# Altium PCB simplefocmini_2022-04-20.pcbdoc
Units mil, origin at the board's own origin, x right, y up, seen from the top; angles counter-clockwise.
Board outline 2697.58 x 2482.54 mil, 2 copper layers (Top Layer, Bottom Layer); 16 components, 31 nets, 68 pads, 40 vias.
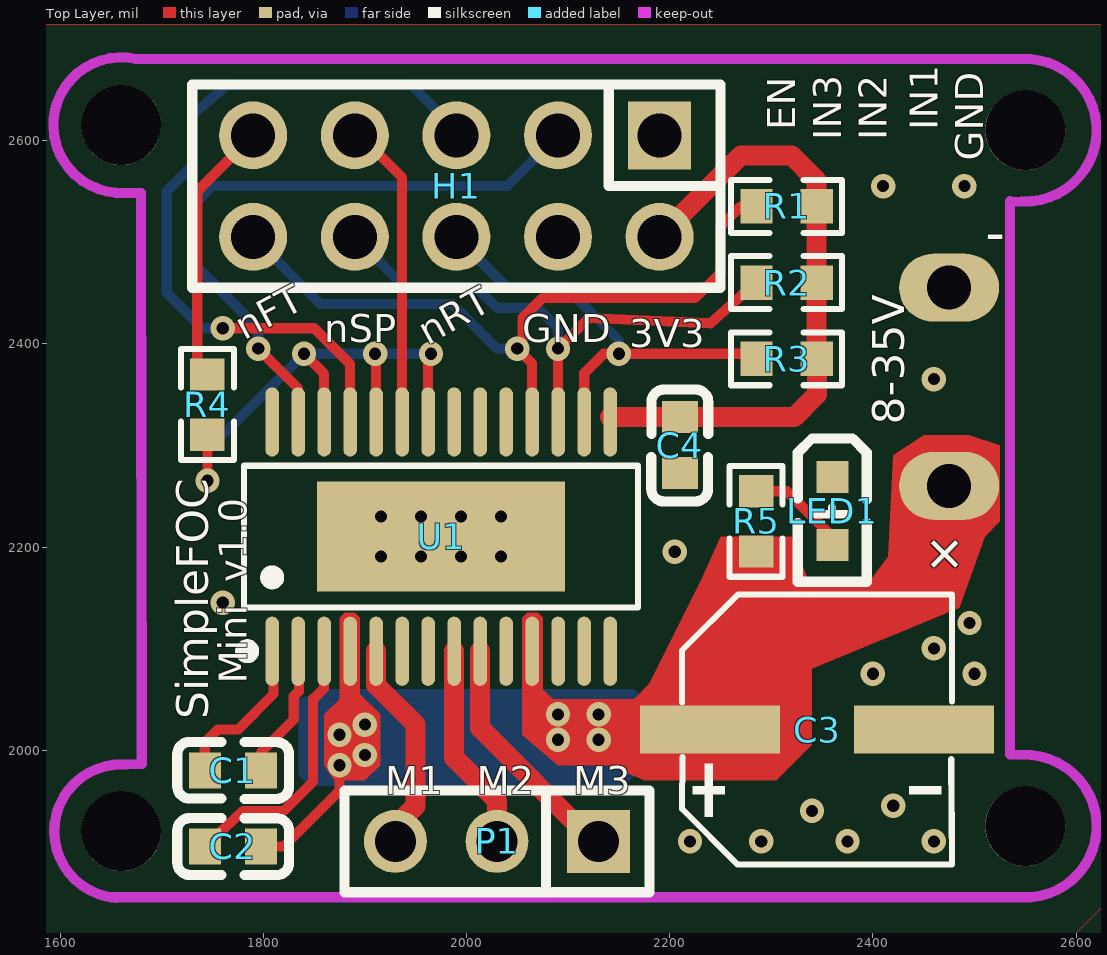
[diagram p0: Top Layer view]
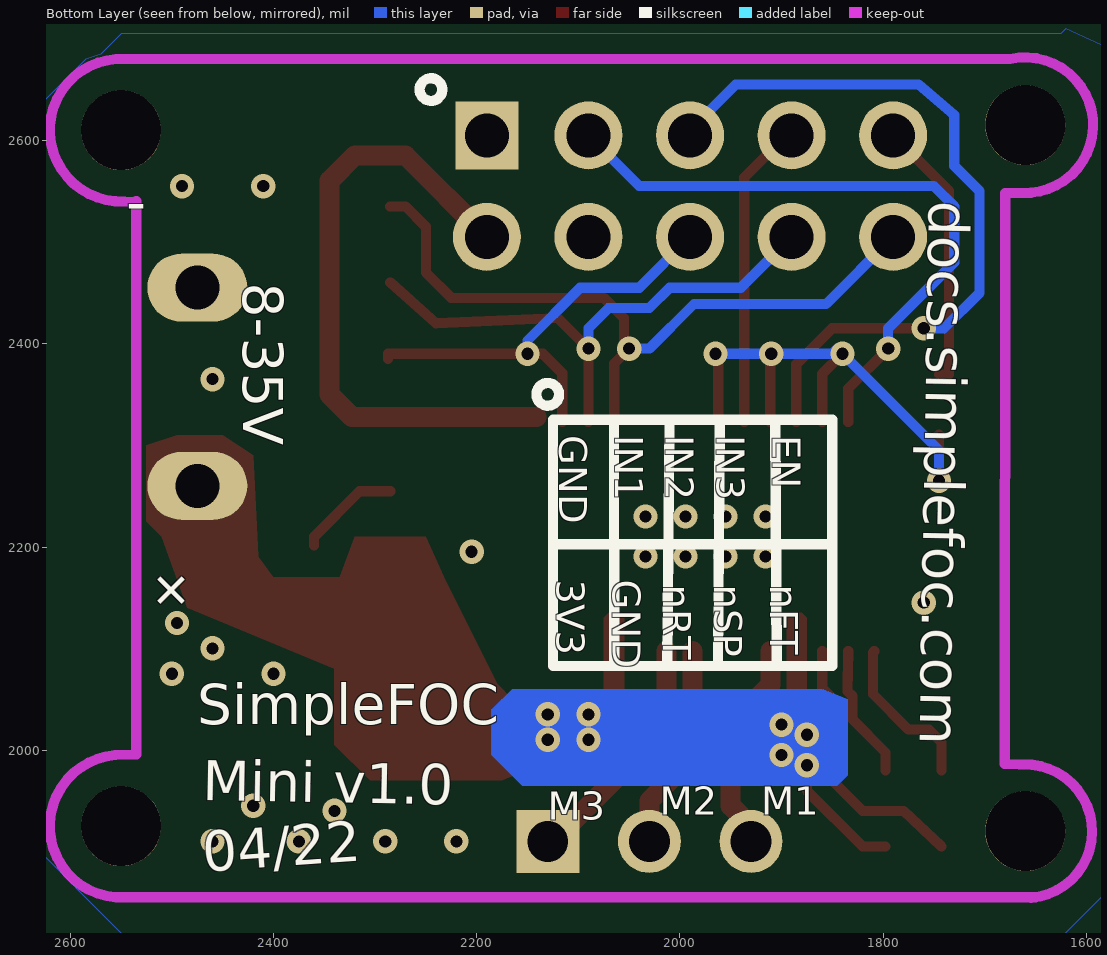
[diagram p1: Bottom Layer view, seen from below]

## Layer stack, top to bottom
Top Layer: signal copper (thickness not stored)
Dielectric: dielectric 12.6, FR-4, Dk 4.8
Bottom Layer: signal copper (thickness not stored)

## Board outline
3697.58,1000 1000,1000 1000,3482.54 3697.58,3482.54

## Components (designator, comment, footprint, x,y, rotation, side; value= is the part's Value field where it differs from the comment)
C1 "100nF" C0603 1770,1980.24 r180 top
C2 "100nF" C0603 1770,1905.24 r180 top
C3 "100uF" CAP-SMD_BD6.3-L6.6-W6.6-FD 2345,2020.24 r0 top
C4 "470nF" C0603 2210,2300.24 r90 top
H1 "Female header2.54mm2*5p Straight" HDR-TH_10P-P2.54-V-F-R2-C5-S2.54 1990,2555.24 r180 top
LED1 "19-213/Y2C-CQ2R2L/3T(CY)" LED0603-R-RD 2360,2235.24 r270 top
P1 "Header-Female-2.54_1x3" HDR-TH_3P-P2.54-V-F 2030,1910.24 r180 top
R1 "10kΩ" R0603 2315,2535.24 r180 top
R2 "10kΩ" R0603 2315,2460.24 r180 top
R3 "10kΩ" R0603 2315,2385.24 r180 top
R4 "10kΩ" R0603 1745,2340.24 r90 top
R5 "1kΩ" R0603 2285,2225.24 r90 top
U1 "DRV8313PWPR" HTSSOP-28_L9.8-W4.5-P0.65-LS6.6-BL-EP 1975,2210.24 r0 top
? "" ? 2795.29,2267.74 r0 top
? "" ? 2107.5,2800.39 r0 top
? "" ? 2107.56,1832.27 r0 top

## Footprints (in the part's own frame and the unit in brackets; to place one, negate y for a bottom-side part, rotate by r counter-clockwise, add the part's x,y. Pads: shape width x height; smd on the part's side, far side on the other; paste and mask are expansions set on the pad)
C0603 [mm]
  rect 0.8x0.9 smd: 1(-0.7,0) 2(0.7,0)
  silkscreen extent -1.41,-0.71 1.39,0.72
CAP-SMD_BD6.3-L6.6-W6.6-FD [mm]
  rect 3.5x1.2 smd: 1(-2.67,0) 2(2.67,0)
  silkscreen extent -3.38,-3.38 3.38,3.38
HDR-TH_3P-P2.54-V-F [mil]
  rect 62x62 hole 40.16: 1(-100,0)
  round 62 hole 40.16: 2(0,0) 3(100,0)
  silkscreen extent -150,-50 150,50
HDR-TH_10P-P2.54-V-F-R2-C5-S2.54 [mm]
  rect 1.575x1.7 hole 1.1: 1(-5.08,-1.27)
  round 1.7 hole 1.1: 2(-5.08,1.27) 3(-2.54,-1.27) 4(-2.54,1.27) 5(0,-1.27) 6(0,1.27) 7(2.54,-1.27) 8(2.54,1.27) 9(5.08,-1.27) 10(5.08,1.27)
  silkscreen extent -6.6,-2.54 6.6,2.54
HTSSOP-28_L9.8-W4.5-P0.65-LS6.6-BL-EP [mm]
  oval 0.343x1.731 smd: 1(-4.225,-2.866) 2(-3.575,-2.866) 3(-2.925,-2.866) 4(-2.275,-2.866) 5(-1.625,-2.866) 6(-0.975,-2.866) 7(-0.325,-2.866) 8(0.325,-2.866) 9(0.975,-2.866) 10(1.625,-2.866) 11(2.275,-2.866) 12(2.925,-2.866) 13(3.575,-2.866) 14(4.225,-2.866) 15(4.225,2.866) 16(3.575,2.866) 17(2.925,2.866) 18(2.275,2.866) 19(1.625,2.866) 20(0.975,2.866) 21(0.325,2.866) 22(-0.325,2.866) 23(-0.975,2.866) 24(-1.625,2.866) 25(-2.275,2.866) 26(-2.925,2.866) 27(-3.575,2.866) 28(-4.225,2.866)
  rect 6.2x2.75 smd: 29(0,0)
  silkscreen extent -5,-3.02 4.93,1.77
LED0603-R-RD [mm]
  rect 0.8x0.8 smd: 1(0.851,0) 2(-0.851,0)
  silkscreen extent -1.82,-0.86 1.77,0.86
R0603 [mil]
  rect 31.75x34.02 smd: 1(-29.66,0) 2(29.66,0)
  silkscreen extent -55,-26 55,26
? [mil]

## Free pads (board coordinates)
  oval 98.42x66.93 hole 43.31: 2(2475,2455.24) 3(2475,2260.24)
  round 78.74 hole 78.74: 5(1660,1920.24) 5(1660,2615.24) 5(2550,1925.24) 5(2550,2610.24)

## Via types
v1: diameter 24, hole 12, Top Layer to Bottom Layer, tented both sides, 32 vias
v2: diameter 23.62, hole 11.81, Top Layer to Bottom Layer, tented both sides, 8 vias

## Nets (pads, with @x,y where several pads share a name; then routed paths per layer and width w, separated by ;. In a path a pad name is that pad's centre, name@x,y a point inside that pad or via, vN(x,y) a via of type N, cw(c..) or ccw(c..) an arc to the next point about the centre after c; other vN are vias at no path point)
3.3V: C4.2 H1.2 R1.1 R2.1 R3.1 U1.15 | length 621.4
  Top Layer w19.68: U1.15@2141.3,2327.84 2141.34,2327.8 C4.2 2322.56,2327.8 2345,2350.24 R3.1@2345,2385.24 ; H1.2 2270,2585.24 2320,2585.24 2344.66,2560.58 R1.1 R2.1 R3.1
EN: R4.1 U1.22 U1.24 U1.26 | length 543.1
  Top Layer w10: v1(1745,2265.24) R4.1 ; v1(1840,2390.24) 1859.84,2370.4 U1.26 ; v1(1910,2390.24) 1911.02,2389.22 U1.24 ; U1.22 1962.21,2387.45 v1(1965,2390.24)
  Bottom Layer w10: v1(1745,2265.24) 1745,2295.24 v1(1840,2390.24) ; v1@1845,2395.24 1850,2390.24 v1(1910,2390.24) v1(1965,2390.24)
GND: C3.2 C4.1 H1.1 H1.4 LED1.2 pad.2 pad.5 U1.6 U1.7 U1.10 U1.12 U1.13 U1.14 U1.20 U1.28 U1.29
  other v1: 2220,1910.24 2290,1910.24 2375,1910.24 2460,1910.24 2340,1940.24 2420,1945.24 2400,2075.24 2500,2075.24 2460,2100.24 2495,2125.24 1760,2145.24 2205,2195.24 2460,2365.24 2410,2555.24 2490,2555.24
  other v2: 1915.95,2190.55 1955.32,2190.55 1994.69,2190.55 2034.06,2190.55 1915.95,2229.92 1955.32,2229.92 1994.69,2229.92 2034.06,2229.92
LED1_1: LED1.1 R5.2 | length 102
  Top Layer w10: R5.2 2315.3,2254.94 2360,2210.24 LED1.1
NFLT: H1.10 R1.2 U1.18 | length 717.8
  Top Layer w10: U1.18@2064.6,2323.04 2064.6,2380.64 v1(2050,2395.24) 2055,2400.24 2055,2425.24 2075,2445.24 2225,2445.24 2250,2470.24 2250,2515.24 2270,2535.24 R1.2@2285,2535.24
  Bottom Layer w10: H1.10 1856.05,2439.19 1986.05,2439.19 2030,2395.24 v1(2050,2395.24)
NRES: H1.6 R3.2 U1.16 | length 447.7
  Top Layer w10: U1.16@2115.8,2323.04 2115.8,2371.04 2135,2390.24 v1(2150,2390.24) 2287.3,2390.24 R3.2@2287.3,2385.24
  Bottom Layer w10: H1.6 2040,2455.24 2098,2455.24 2150,2403.24 v1(2150,2390.24)
NSLP: H1.8 R2.2 U1.17 | length 552.3
  Top Layer w10: U1.17@2090.2,2323.04 2090,2323.24 v1(2090,2395.24) 2120,2425.24 2240,2420.24 R2.2@2285,2460.24
  Bottom Layer w10: H1.8 1940,2455.24 2010,2455.24 2030,2435.24 2070,2435.24 2090,2415.24 v1(2090,2395.24)
R4_2: H1.9 R4.2 | length 268.1
  Top Layer w10: R4.2 1735,2369.9 1735,2550.24 H1.9
S$5063: 
S$6958: 
S$6962: 
S$6969: 
S$6973: 
S$6977: 
S$6981: 
S$8705: 
S$8709: 
S$8746: 
S$8750: 
U1_1: C1.2 U1.1 | length 157.4
  Top Layer w10: C1.2 1742.4,2007.64 1755,2020.24 1775,2020.24 1810,2055.24 1810,2096.04 U1.1
U1_2: C1.1 U1.2 | length 132.7
  Top Layer w10: C1.1 1797.56,1997.8 1830,2030.24 1830,2053.07 1835,2058.07 U1.2@1834.25,2097.41
U1_3: C2.2 U1.3 | length 265.1
  Top Layer w10: C2.2 1780,1940.24 1820,1940.24 1849,1969.24 1849,2050.24 1859.8,2061.04 U1.3
U1_5: P1.3 U1.5 | length 211.6
  Top Layer w19.68: U1.5 1911,2064.24 1950,2025.24 1950,1945.24 1930,1925.24 P1.3
U1_8: P1.2 U1.8 | length 204.6
  Top Layer w19.68: U1.8 1987.8,1992.44 2030,1950.24 P1.2
U1_9: P1.1 U1.9 | length 238.4
  Top Layer w19.68: U1.9 2013.39,2021.85 2125,1910.24 P1.1
U1_19: U1.19
U1_21: U1.21
U1_23: H1.7 U1.23 | length 299.4
  Top Layer w10: H1.7@1895,2605.24 1936.6,2563.64 U1.23@1936.6,2323.04
U1_25: H1.5 U1.25 | length 746.4
  Top Layer w10: v1(1760,2415.24) 1850,2415.24 1885.43,2379.81 U1.25
  Bottom Layer w10: v1(1760,2415.24) 1740,2415.24 1705,2450.24 1705,2550.24 1730,2575.24 1730,2625.24 1765,2655.24 1945,2655.24 1990,2610.24 H1.5
U1_27: H1.3 U1.27 | length 644.4
  Top Layer w10: v1(1795,2395.24) 1834.25,2355.99 U1.27@1834.25,2323.06
  Bottom Layer w10: v1(1795,2395.24) 1795,2415.24 1730,2480.24 1730,2535.24 1750,2555.24 2040,2555.24 H1.3
VCC: C2.1 C3.1 pad.3 R5.1 U1.4 U1.11 | length 125.2
  Top Layer w10: C2.1 1820,1905.24 1875,1960.24 v1(1875,1985.24)
  other v1: 1900,1995.24 2090,2010.24 2130,2010.24 1875,2015.24 1900,2025.24 2090,2035.24 2130,2035.24

## Polygon pours and split planes (outlines as drawn)
GND on Bottom Layer (solid): 2530,1800.24 2520,1790.24 1650,1790.24 1560,1880.24 1555,2680.24 1620,2710.24 1625,2705.24 2550,2705.24 2570,2685.24 2585,2680.24 2660,2605.24 2660,1930.24 2530,1800.24
GND on Top Layer (solid): 1550,2715.24 2630,2715.24 2705,2640.24 2705,1925.24 2555,1775.24 1675,1775.24 1615,1775.24 1515,1875.24 1515,2640.24 1505,2650.24 1500,2650.24

## Keep-outs
Keep-Out Layer:
  lines w10 net S$5063: 1653.46,1985.68 ccw(c1660,1920.24) 1654.54,1854.7 ; 1654.46,2548.76 cw(c1660,2615.24) 1675,2680.24 ; 2555,1855.24 ccw(c2550,1925.24) 2555.83,1995.17 ; 2555,2680.24 cw(c2550,2610.24) 2555.83,2540.3

## Other copper
Top Layer:
  region net VCC: 1895,1985.24 1910,1985.24 1915,1985.24 1900,1970.24 1870,1970.24 1860,1985.24 1860,2035.24 1875,2050.24 1875,2130.24 1880,2135.24 1890,2135.24 1895,2130.24 1895,2055.24 1915,2035.24 1915,1985.24 1910,1985.24 1895,1985.24 1910,1985.24
  region net VCC: 2175,1970.24 2140,1985.24 2090,1985.24 2055,2015.24 2055,2130.24 2060,2135.24 2070,2135.24 2075,2130.24 2075,2060.24 2085,2050.24 2165,2050.24 2180,2065.24 2230,2165.24 2250,2210.24 2320,2210.24 2335,2170.24 2400,2170.24 2415,2190.24 2420,2290.24 2450,2310.24 2495,2310.24 2525,2300.24 2525,2225.24 2510,2210.24 2485,2140.24 2340,2080.24 2340,2005.24 2305,1970.24 2175,1970.24
Bottom Layer:
  region net VCC: 1860,2060.24 1835,2050.24 1835,2005.24 1835,1975.24 1845,1965.24 1875,1965.24 2155,1965.24 2185,1995.24 2185,2005.24 2185,2040.24 2165,2060.24 2135,2060.24 1890,2060.24

## Silkscreen, mask and mechanical layers (free items; w line width, h text height)
Top Overlay:
  text "EN" at 2323.78,2610.24 h27.56 r90
  text "IN1" at 2463.78,2610.24 h27.56 r90
  text "IN3" at 2368.78,2600.24 h27.56 r90
  text "IN2" at 2413.78,2600.24 h27.56 r90
  text "GND" at 2508.78,2580.24 h27.56 r90
  text "-" at 2530,2519.92 h39.37 r180
  text "nFT" at 1781.47,2403.07 h27.56 r28
  text "nSP" at 1860,2401.46 h27.56
  text "GND" at 2055,2401.46 h27.56
  text "nRT" at 1961.68,2398.19 h27.56 r29
  text "3V3" at 2160,2396.46 h27.56
  text "8-35V" at 2430.75,2320.24 h31.5 r90
  text "+" at 2498.92,2189.16 h39.37 r135
  text "v1.0" at 1783.78,2165.24 h27.56 r90
  text "Mini" at 1783.78,2065.24 h27.56 r90
  text "SimpleFOC" at 1745.75,2030.24 h31.5 r90
  text "M1" at 1920,1956.46 h27.56
  text "M2" at 2010,1956.46 h27.56
  text "M3" at 2105,1956.46 h27.56
Bottom Overlay:
  circle w10: c2245,2650.24 r11.18
  circle w10: c2130,2350.24 r11.18
  lines w10 net S$6958: 1850,2082.74 1850,2325.24 2125,2325.24 2125,2082.74 1850,2082.74
  lines w10 net S$6962: 1850,2223.59 1850,2202.74 2125,2202.74 2125,2226.09
  lines w10 net S$6969: 2062.22,2325.24 2065,2322.45 2064.63,2082.74
  lines w10 net S$6973: 2007.2,2325.24 2010.2,2325.24 2012.5,2082.74
  lines w10 net S$6977: 1960.72,2325.24 1962.5,2082.74
  lines w10 net S$6981: 1904.72,2082.74 1906.2,2325.24
  text "-" at 2525,2549.92 h39.37 r180
  text "docs.simplefoc.com" at 1754.68,2540.58 h39.37 r91
  text "8-35V" at 2429.68,2460.24 h39.37 r90
  text "EN" at 1908.78,2310.24 h27.56 r90
  text "IN3" at 1963.78,2310.24 h27.56 r90
  text "IN2" at 2013.78,2310.24 h27.56 r90
  text "IN1" at 2063.78,2310.24 h27.56 r90
  text "GND" at 2118.78,2310.24 h27.56 r90
  text "GND" at 2066.28,2167.74 h27.56 r90
  text "3V3" at 2121.28,2167.74 h27.56 r90
  text "nFT" at 1911.28,2162.74 h27.56 r90
  text "nSP" at 1966.28,2162.74 h27.56 r90
  text "nRT" at 2016.28,2162.74 h27.56 r90
  text "+" at 2528.92,2161.32 h39.37 r45
  text "SimpleFOC" at 2475,2025.55 h39.37
  text "Mini v1.0" at 2470.34,1950.56 h39.37 r1
  text "M1" at 1920,1936.46 h27.56
  text "M2" at 2020,1936.46 h27.56
  text "M3" at 2130,1931.46 h27.56
  text "04/22" at 2468.63,1880.6 h39.37 r356